# Altium PCB 水位传感.pcbdoc
Units mil, origin at the board's own origin, x right, y up, seen from the top; angles counter-clockwise.
Board outline 1300 x 2727.19 mil, 2 copper layers (Top Layer, Bottom Layer); 6 components, 6 nets, 17 pads, 8 vias.
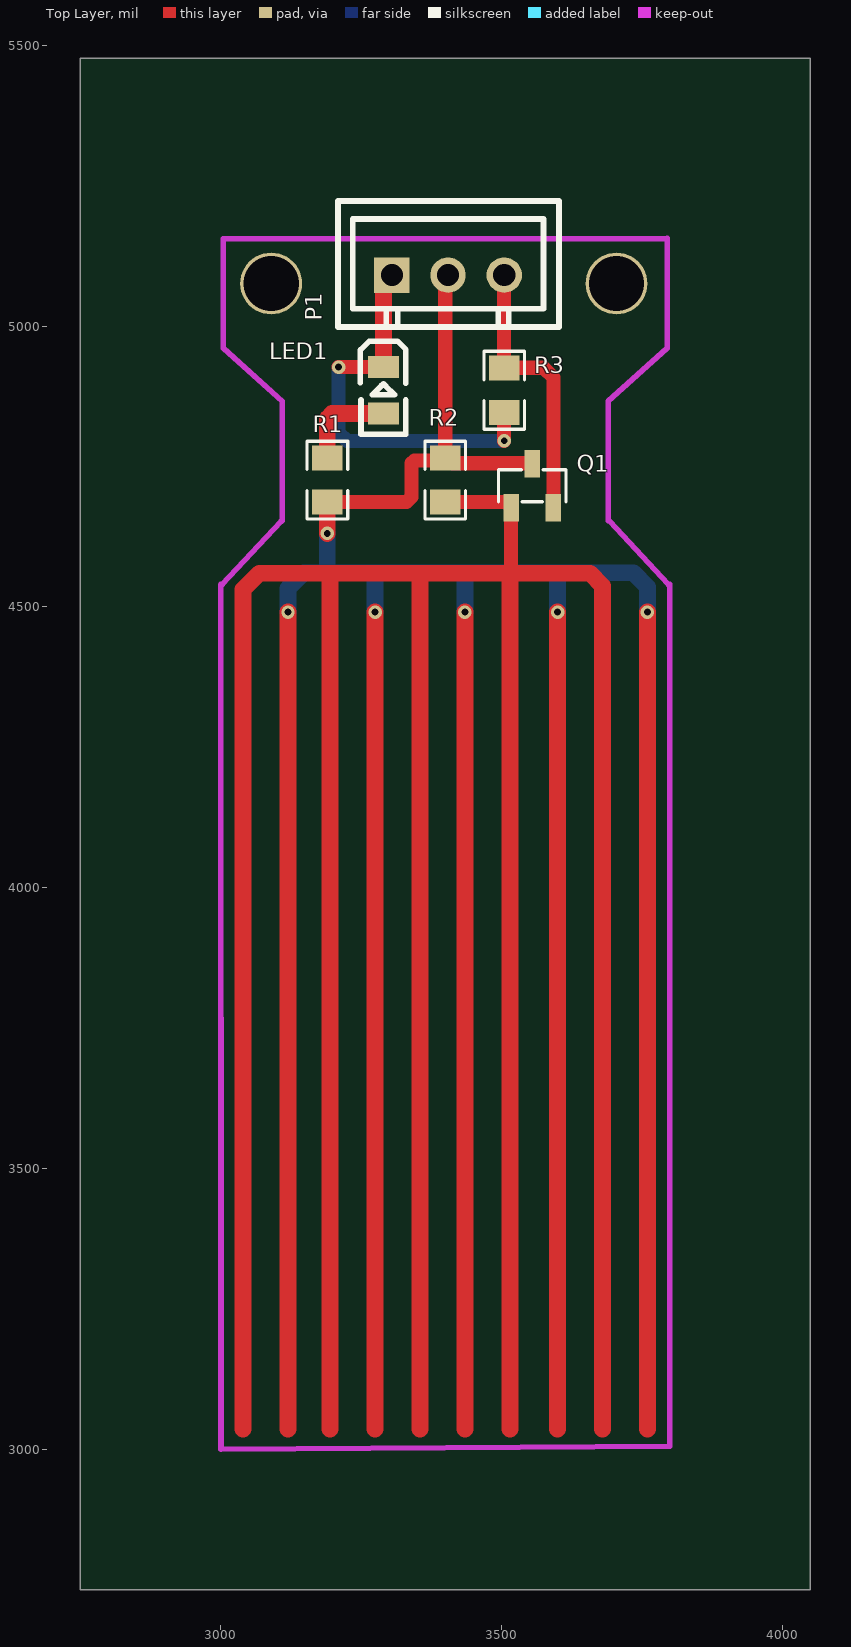
[diagram p0: Top Layer view]
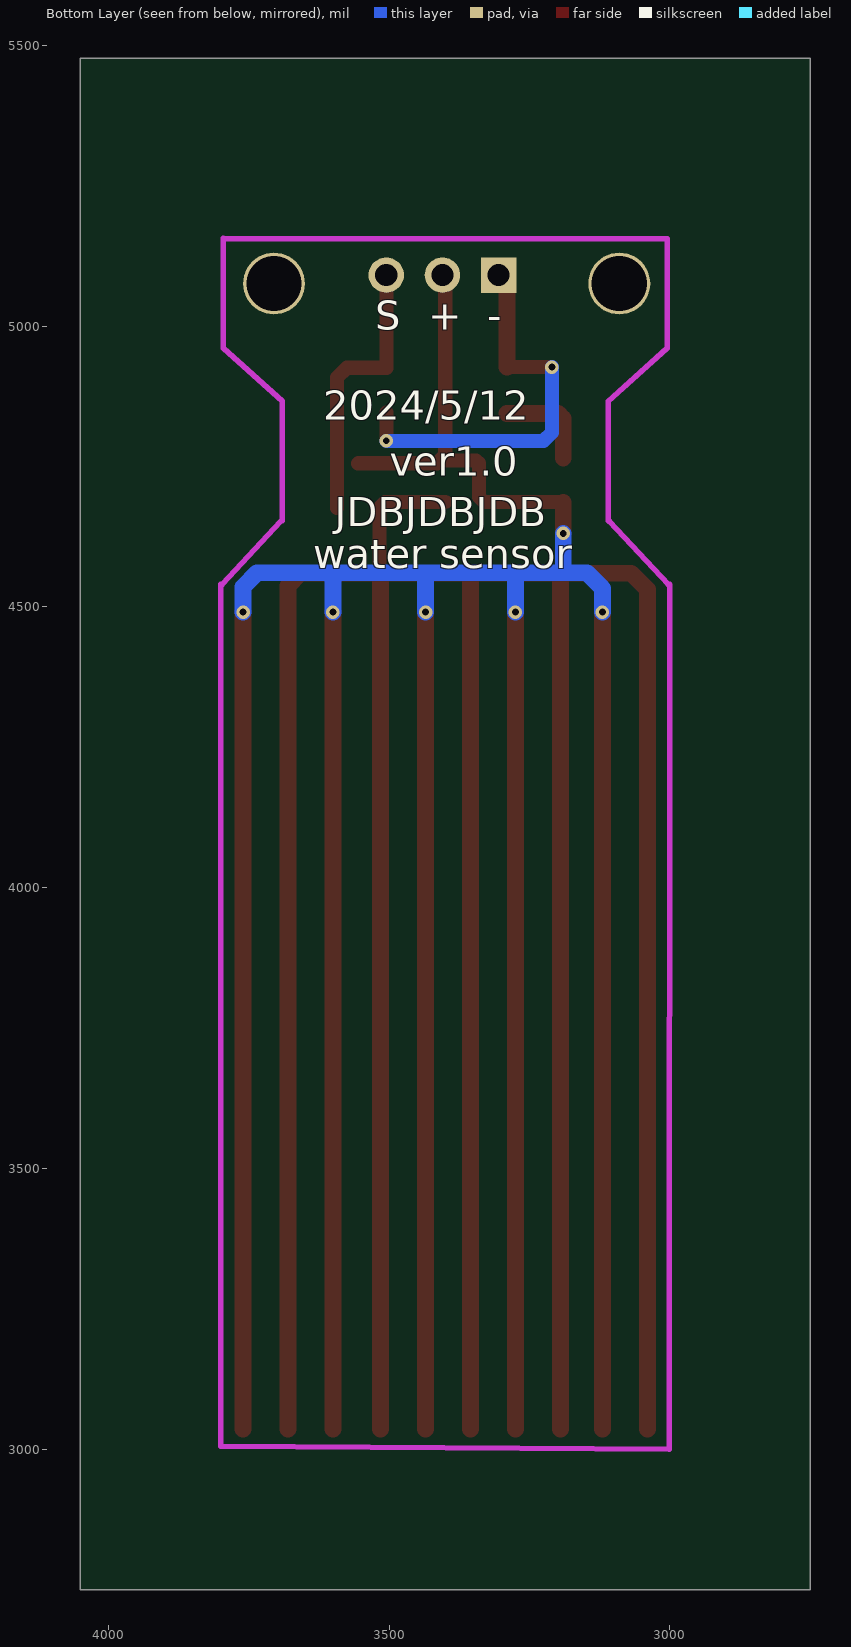
[diagram p1: Bottom Layer view, seen from below]

## Layer stack, top to bottom
Top Layer: signal copper (thickness not stored)
Dielectric: dielectric 12.6, FR-4, Dk 4.8
Bottom Layer: signal copper (thickness not stored)

## Board outline
4050,2750 2750,2750 2750,5477.19 4050,5477.19

## Components (designator, comment, footprint, x,y, rotation, side; value= is the part's Value field where it differs from the comment)
LED1 "NCD0805R1" LED0805-R-RD 3290,4885.98 r270 top
P1 "水位传感器" CONN-TH_3P-P2.54_2501S-3P 3405,5090.98 r0 top
Q1 "SS8050_C7420370" SOT-23-3_L2.9-W1.3-P1.90-LS2.4-BR 3555,4715.98 r270 top
R1 "0805W8F1001T5E" R0805 3190,4725.98 r90 top
R2 "0805W8F1000T5E" R0805 3400,4725.98 r90 top
R3 "0805W8F1000T5E" R0805 3505,4885.98 r90 top

## Footprints (in the part's own frame and the unit in brackets; to place one, negate y for a bottom-side part, rotate by r counter-clockwise, add the part's x,y. Pads: shape width x height; smd on the part's side, far side on the other; paste and mask are expansions set on the pad)
CONN-TH_3P-P2.54_2501S-3P [mm]
  rect 1.6x1.6 hole 1: 1(-2.54,0)
  round 1.6 hole 1: 2(0,0) 3(2.54,0)
  silkscreen extent -4.98,-2.35 5.02,3.35
LED0805-R-RD [mm]
  rect 1x1.4 smd: 1(1.05,0) 2(-1.05,0)
  silkscreen extent -2.22,-1.04 1.99,1.01
R0805 [mm]
  rect 1.133x1.377 smd: 1(-1,0) 2(1,0)
  silkscreen extent -1.76,-0.92 1.76,0.92
SOT-23-3_L2.9-W1.3-P1.90-LS2.4-BR [mm]
  rect 1.25x0.7 smd: 1(1,-0.95) 2(1,0.95) 3(-1,0)
  silkscreen extent -0.73,-1.53 0.73,1.53

## Free pads (board coordinates)
  round 110.24 hole 98.43: NC(3090,5075.98) NC(3705,5075.98)
  round 0.1 hole 36: NC1(3705,5090.98)

## Via types
v1: diameter 24.02, hole 12.01, Top Layer to Bottom Layer, 8 vias

## Nets (pads, with @x,y where several pads share a name; then routed paths per layer and width w, separated by ;. In a path a pad name is that pad's centre, name@x,y a point inside that pad or via, vN(x,y) a via of type N, cw(c..) or ccw(c..) an arc to the next point about the centre after c; other vN are vias at no path point)
$1N348: LED1.1 R1.2 | length 174.2
  Top Layer w30: R1.2 3190,4835.98 3198.65,4844.63 LED1.1
$1N781: Q1.1 R2.1 | length 8472
  Top Layer w25: R2.1 3507.6,4686.61 Q1.1 3517.33,4676.33 3517.33,4560.2
  Top Layer w30: 3040,3035.98 3040,4530.98 3069.22,4560.2 3197.49,4560.2 ; 3195,3035.98 3195,4557.71 3197.49,4560.2 ; 3355,3035.98 3355,4558 3352.8,4560.2 ; 3515,3035.98 3515,4557.87 3517.33,4560.2 ; 3680,3035.98 3680,4537.69 3657.49,4560.2 3517.33,4560.2 ; 3197.49,4560.2 3352.8,4560.2 ; 3352.8,4560.2 3517.33,4560.2
AOUT: P1.3 Q1.2 R3.2 | length 492.5
  Top Layer w25: P1.3 R3.2 3505.63,4925.98 3575,4925.98 3592.4,4908.58 Q1.2
GND: LED1.2 P1.1 R3.1 | length 718.1
  Top Layer w25: v1(3210,4927.33) LED1.2 ; v1(3505,4795.98) R3.1
  Top Layer w30: LED1.2 3290,5075.98 P1.1
  Bottom Layer w25: v1(3210,4927.33) 3210,4810.98 3225,4795.98 v1(3505,4795.98)
VCC: P1.2 Q1.3 R1.1 R2.2 | length 9131.8
  Top Layer w25: R1.1 3330.63,4686.61 3340,4695.98 3340,4755.98 3345,4760.98 3404.37,4760.98 R2.2 ; P1.2 3400,5085.97 3400,4770.98 3415,4755.98 3554.37,4755.98 Q1.3
  Top Layer w30: 3120,3035.98 v1(3120,4490.98) ; v1(3190,4630.98) R1.1 ; 3275,3035.98 v1(3275,4490.98) ; 3435,3035.98 v1(3435,4490.98) ; 3600,3035.98 v1(3600,4490.98) ; 3760,3035.98 v1(3760,4490.98)
  Bottom Layer w30: v1(3120,4490.98) 3120,4533.4 3147.57,4560.98 3190.81,4560.98 ; v1(3190,4630.98) 3190,4561.78 3190.81,4560.98 ; v1(3275,4490.98) 3275,4559.33 3273.35,4560.98 ; v1(3435,4490.98) 3435,4560.28 3434.3,4560.98 ; v1(3600,4490.98) 3600,4559.56 3598.58,4560.98 ; v1(3760,4490.98) 3760,4535.98 3735,4560.98 3598.58,4560.98 ; 3190.81,4560.98 3273.35,4560.98 ; 3273.35,4560.98 3434.3,4560.98 ; 3434.3,4560.98 3598.58,4560.98
"": pad.NC pad.NC1

## Keep-outs
Board Outline Layer:
  lines w10 net "": 3000,4540.11 3000.81,3000 3800,3005.58 3800,4540.51 ; 3002.5,4539.63 3107.5,4652.33 ; 3110,4653.28 3110,4866.36 ; 3110,4865.98 3005,4960.58 3005,5155.98 3792.4,5155.98 ; 3690,4653.67 3690,4866.75 ; 3690,4866.37 3795,4960.98 3795,5156.37 ; 3692.5,4652.72 3797.5,4540.02

## Silkscreen, mask and mechanical layers (free items; w line width, h text height)
Bottom Silkscreen Layer:
  text "-" at 3325,4993.55 h52.3
  text "+" at 3430,4993.55 h52.3
  text "S" at 3525,4993.55 h52.3
  text "2024/5/12" at 3616.89,4833.74 h51.92
  text "ver1.0" at 3498.73,4733.74 h51.92
  text "JDBJDBJDB" at 3596.89,4643.74 h51.92
  text "water sensor" at 3635.05,4568.74 h51.92
Top Solder Mask Layer:
  lines w30 net "": 3040,3037.25 3040,4492.25 ; 3120,3035.98 3120,4490.98 ; 3195,3035.98 3195,4490.87 ; 3275,3035.98 3275,4490.98 ; 3355,3035.98 3355,4491.29 ; 3435,3035.98 3435,4490.98 ; 3515,3035.98 3515,4491.34 ; 3600,3035.98 3600,4490.98 ; 3680,3035.98 3680,4491.28 ; 3760,3035.98 3760,4490.98